# Altium PCB frm-voltrod.PcbDoc (part 2 of 2)
Units mm, origin at the board's own origin, x right, y up, seen from the top; angles counter-clockwise.
Board outline 80 x 200 mm, 2 copper layers (Top Layer, Bottom Layer), stack 1.56 mm thick; 234 components, 176 nets, 667 pads, 121 vias.
Unrouted connection lines stored in the file: 240.
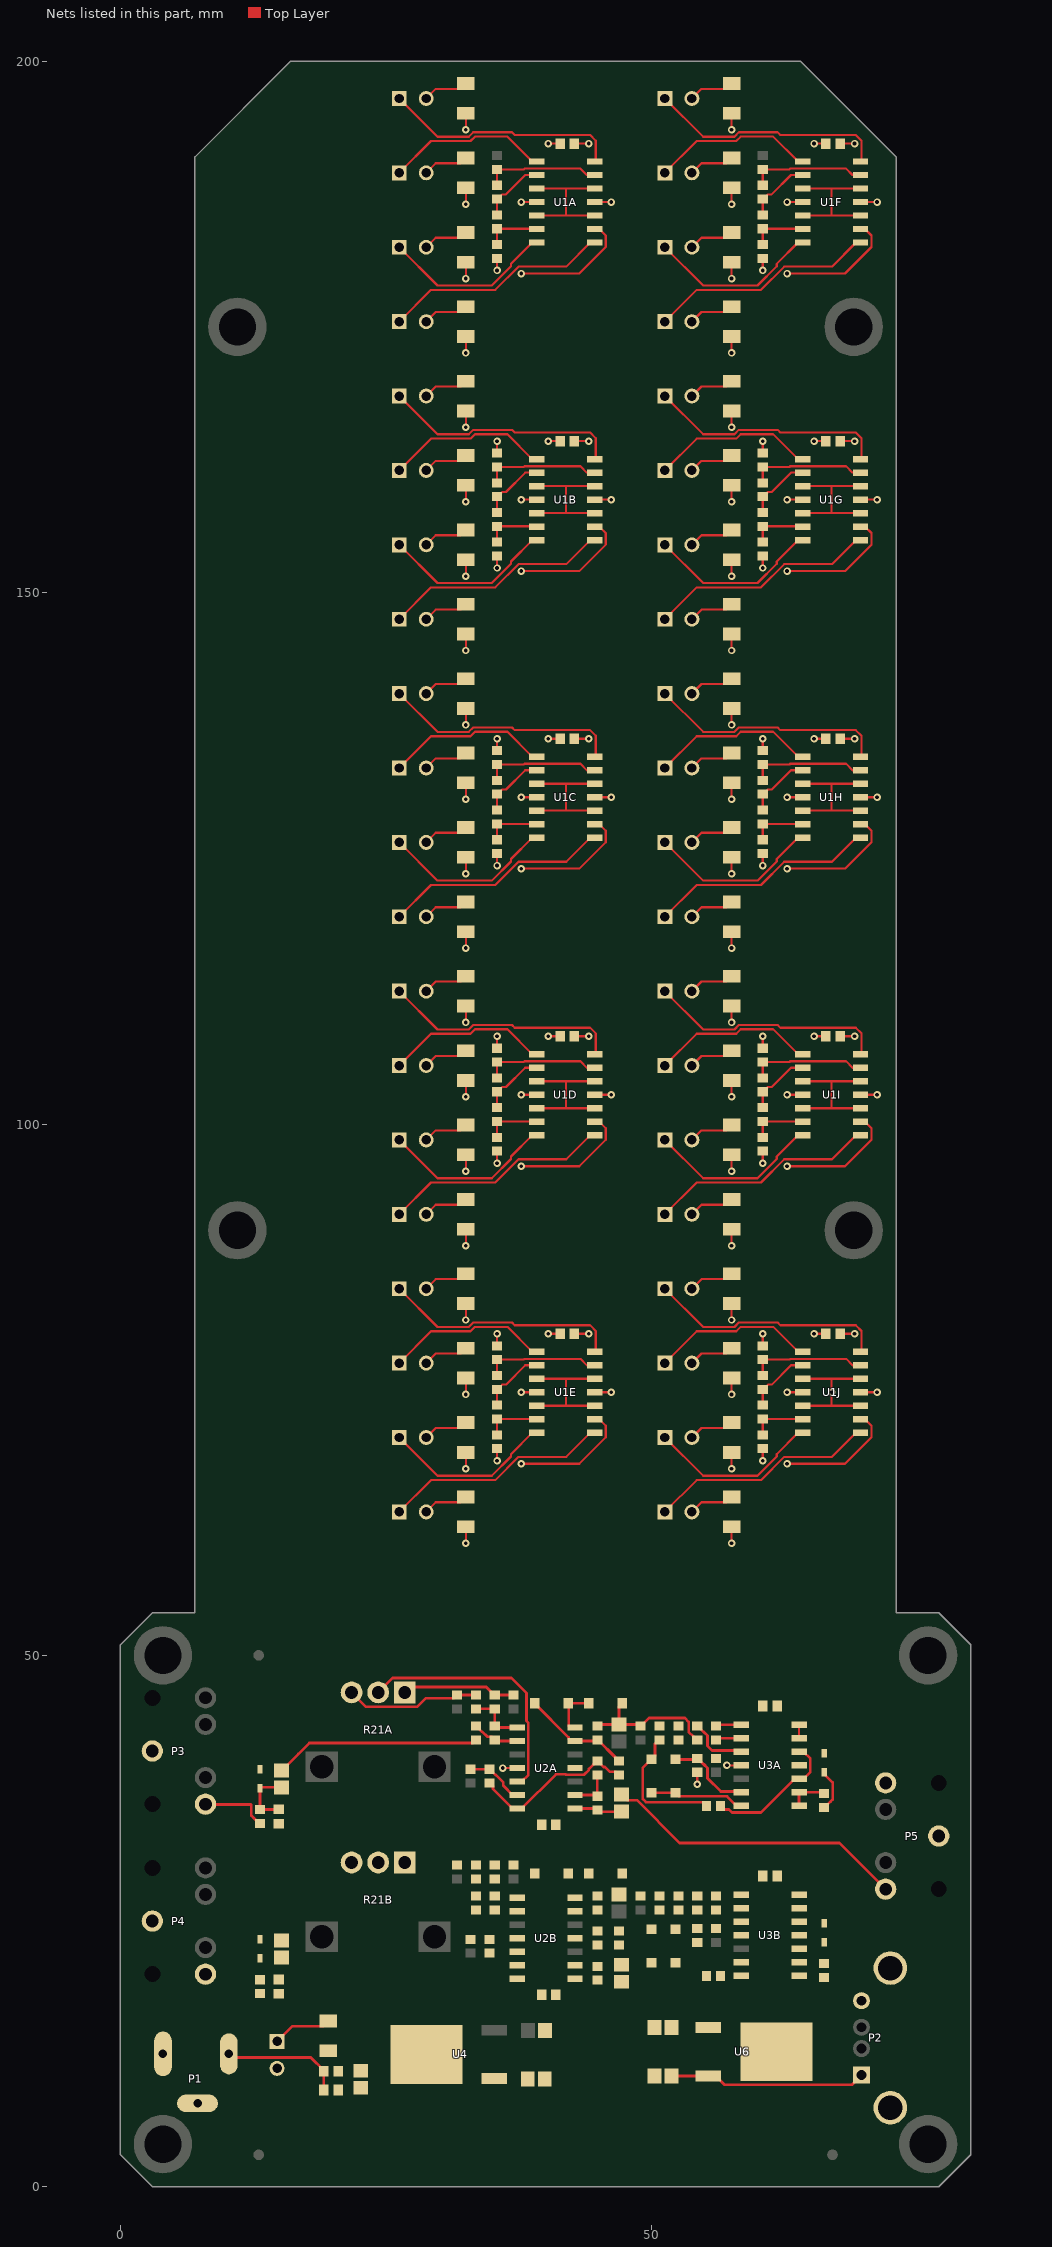
[diagram p2: the nets of this part, all layers, seen from the top]

## Via types
v1: diameter 0.7, hole 0.35, Top Layer to Bottom Layer, tented both sides, 121 vias

## Nets (pads, with @x,y where several pads share a name; then routed paths per layer and width w, separated by ;. In a path a pad name is that pad's centre, name@x,y a point inside that pad or via, vN(x,y) a via of type N, cw(c..) or ccw(c..) an arc to the next point about the centre after c; other vN are vias at no path point) (continued)
+12V: C1A.1 C1B.1 C1C.1 C1D.1 C1E.1 C1F.1 C1G.1 C1H.1 C1I.1 C1J.1 C2A.1 C2B.1 C3A.1 C3B.1 C8.1 C9.1 C12.1 L1.2 L2.2 R29A.2 R29B.2 R32.2 U1A.4 U1B.4 U1C.4 U1D.4 U1E.4 U1F.4 U1G.4 U1H.4 U1I.4 U1J.4 U2A.4 U2B.4 U3A.4 U3B.4 U4.1 U6.1 | length 29.5
  Top Layer w0.203: v1(35.984,39.396) U2A.4@37.323,39.396 ; v1(37.724,74.754) U1E.4@39.187,74.754 ; v1(37.724,102.754) U1D.4@39.187,102.754 ; v1(37.724,130.754) U1C.4@39.187,130.754 ; v1(37.724,158.754) U1B.4@39.187,158.754 ; v1(37.724,186.754) U1A.4@39.187,186.754 ; v1(40.264,80.256) C1E.1@41.367,80.256 ; v1(40.264,108.256) C1D.1@41.367,108.256 ; v1(40.264,136.256) C1C.1@41.367,136.256 ; v1(40.264,164.256) C1B.1@41.367,164.256 ; v1(40.264,192.256) C1A.1@41.367,192.256 ; v1(54.272,37.872) R29A.2@54.272,39 ; v1(57.066,39.65) U3A.4@58.405,39.65 ; v1(62.724,74.754) U1J.4@64.187,74.754 ; v1(62.724,102.754) U1I.4@64.187,102.754 ; v1(62.724,130.754) U1H.4@64.187,130.754 ; v1(62.724,158.754) U1G.4@64.187,158.754 ; v1(62.724,186.754) U1F.4@64.187,186.754 ; v1(65.264,80.256) C1J.1@66.367,80.256 ; v1(65.264,108.256) C1I.1@66.367,108.256 ; v1(65.264,136.256) C1H.1@66.367,136.256 ; v1(65.264,164.256) C1G.1@66.367,164.256 ; v1(65.264,192.256) C1F.1@66.367,192.256
GND: C1A.2 C1B.2 C1C.2 C1D.2 C1E.2 C1F.2 C1G.2 C1H.2 C1I.2 C1J.2 C2A.2 C2B.2 C3A.2 C3B.2 C6A.2 C6B.2 C8.2 C9.2 C10.2 C12.2 C13.2 D7A.2 D7B.2 D8A.2 D8B.2 D11.1 P1.2 P1.3 P2.4 P2.5 P2.6 P3.1 P4.1 P5.1 R2A.2 R2B.2 R2C.2 R2D.2 R2E.2 R2F.2 R2G.2 R2H.2 R2I.2 R2J.2 R4A.2 R4B.2 R4C.2 R4D.2 R4E.2 R4F.2 R4G.2 R4H.2 R4I.2 R4J.2 R6A.2 R6B.2 R6C.2 R6D.2 R6E.2 R6F.2 R6G.2 R6H.2 R6I.2 R6J.2 R7E.2 R7J.2 R8A.2 R8B.2 R8C.2 R8D.2 R8E.2 R8F.2 R8G.2 R8H.2 R8I.2 R8J.2 R26A.2 R26B.2 U1A.11 U1B.11 U1C.11 U1D.11 U1E.9 U1E.11 U1F.11 U1G.11 U1H.11 U1I.11 U1J.9 U1J.11 U2A.11 U2B.11 U3A.11 U3B.11 U4.4 U6.4 | length 115.9
  Top Layer w0.203: v1(32.5,60.554) R8E.2@32.5,62.1 ; v1(32.5,67.554) R6E.2@32.5,69.1 ; v1(32.5,74.554) R4E.2@32.5,76.1 ; v1(32.5,81.554) R2E.2@32.5,83.1 ; v1(32.5,88.554) R8D.2@32.5,90.1 ; v1(32.5,95.554) R6D.2@32.5,97.1 ; v1(32.5,102.554) R4D.2@32.5,104.1 ; v1(32.5,109.554) R2D.2@32.5,111.1 ; v1(32.5,116.554) R8C.2@32.5,118.1 ; v1(32.5,123.554) R6C.2@32.5,125.1 ; v1(32.5,130.554) R4C.2@32.5,132.1 ; v1(32.5,137.554) R2C.2@32.5,139.1 ; v1(32.5,144.554) R8B.2@32.5,146.1 ; v1(32.5,151.554) R6B.2@32.5,153.1 ; v1(32.5,158.554) R4B.2@32.5,160.1 ; v1(32.5,165.554) R2B.2@32.5,167.1 ; v1(32.5,172.554) R8A.2@32.5,174.1 ; v1(32.5,179.554) R6A.2@32.5,181.1 ; v1(32.5,186.554) R4A.2@32.5,188.1 ; v1(32.5,193.554) R2A.2@32.5,195.1 ; v1(35.438,68.318) R7E.2@35.438,69.446 ; v1(37.724,68.026) 43.175,68.026 45.667,70.518 45.667,71.609 45.062,72.214 U1E.9@44.637,72.214 ; C1E.2@42.717,80.256 v1(44.074,80.256) ; C1D.2@42.717,108.256 v1(44.074,108.256) ; C1C.2@42.717,136.256 v1(44.074,136.256) ; C1B.2@42.717,164.256 v1(44.074,164.256) ; C1A.2@42.717,192.256 v1(44.074,192.256) ; U1E.11@44.637,74.754 v1(46.192,74.754) ; U1D.11@44.637,102.754 v1(46.192,102.754) ; U1C.11@44.637,130.754 v1(46.192,130.754) ; U1B.11@44.637,158.754 v1(46.192,158.754) ; U1A.11@44.637,186.754 v1(46.192,186.754) ; v1(57.5,60.554) R8J.2@57.5,62.1 ; v1(57.5,67.554) R6J.2@57.5,69.1 ; v1(57.5,74.554) R4J.2@57.5,76.1 ; v1(57.5,81.554) R2J.2@57.5,83.1 ; v1(57.5,88.554) R8I.2@57.5,90.1 ; v1(57.5,95.554) R6I.2@57.5,97.1 ; v1(57.5,102.554) R4I.2@57.5,104.1 ; v1(57.5,109.554) R2I.2@57.5,111.1 ; v1(57.5,116.554) R8H.2@57.5,118.1 ; v1(57.5,123.554) R6H.2@57.5,125.1 ; v1(57.5,130.554) R4H.2@57.5,132.1 ; v1(57.5,137.554) R2H.2@57.5,139.1 ; v1(57.5,144.554) R8G.2@57.5,146.1 ; v1(57.5,151.554) R6G.2@57.5,153.1 ; v1(57.5,158.554) R4G.2@57.5,160.1 ; v1(57.5,165.554) R2G.2@57.5,167.1 ; v1(57.5,172.554) R8F.2@57.5,174.1 ; v1(57.5,179.554) R6F.2@57.5,181.1 ; v1(57.5,186.554) R4F.2@57.5,188.1 ; v1(57.5,193.554) R2F.2@57.5,195.1 ; v1(60.438,68.318) R7J.2@60.438,69.446 ; v1(62.724,68.026) 68.175,68.026 70.667,70.518 70.667,71.609 70.062,72.214 U1J.9@69.637,72.214 ; C1J.2@67.717,80.256 v1(69.074,80.256) ; C1I.2@67.717,108.256 v1(69.074,108.256) ; C1H.2@67.717,136.256 v1(69.074,136.256) ; C1G.2@67.717,164.256 v1(69.074,164.256) ; C1F.2@67.717,192.256 v1(69.074,192.256) ; U1J.11@69.637,74.754 v1(71.192,74.754) ; U1I.11@69.637,102.754 v1(71.192,102.754) ; U1H.11@69.637,130.754 v1(71.192,130.754) ; U1G.11@69.637,158.754 v1(71.192,158.754) ; U1F.11@69.637,186.754 v1(71.192,186.754)
NetC4A_1: C4A.1 C6A.1 D7A.1 R16A.1 | length 5.9
  Top Layer w0.254: C6A.1@14.902,35.499 13.149,35.499 R16A.1@13.124,35.474 D7A.1@13.124,37.48 13.224,37.58 C4A.1@15.156,37.58
NetC4A_2: C4A.2 R19A.1 | length 19.5
  Top Layer w0.254: C4A.2@15.156,39.18 15.206,39.18 16.75,40.724 16.75,40.729 17.771,41.75 33.146,41.75 R19A.1@33.444,42.048
NetC4B_1: C4B.1 C6B.1 D7B.1 R16B.1
NetC4B_2: C4B.2 R19B.1
NetC5A_1: C5A.1 D6A.1 R9A.2 R18A.2 R24A.1 | length 13.4
  Top Layer w0.254: R9A.2@44.874,43.348 45.024,43.498 C5A.1@46.906,43.498 ; D6A.1@47.211,45.492 46.906,45.187 C5A.1@46.906,43.498 ; R24A.1@54.272,42.048 53.974,42.346 53.907,42.346 53.467,42.786 53.467,43.742 53.106,44.103 49.743,44.103 48.988,43.348 R18A.2@48.938,43.348 48.788,43.498 C5A.1@46.906,43.498
NetC5B_1: C5B.1 D6B.1 R9B.2 R18B.2 R24B.1
NetC7A_1: C7A.1 R27A.2 U2A.8 | length 4.5
  Top Layer w0.254: U2A.8@42.773,35.586 44.732,35.586 R27A.2@44.874,35.444 45.024,35.294 C7A.1@47.16,35.294
NetC7A_2: C7A.2 P5.2 | length 28.5
  Top Layer w0.254: C7A.2@47.16,36.894 47.683,36.371 48.603,36.371 52.622,32.353 67.647,32.353 P5.2@72,28
NetC7B_1: C7B.1 R27B.2 U2B.8
NetC7B_2: C7B.2 P5.3
NetC13_1: C13.1 P2.1 U6.3 | length 18.6
  Top Layer w0.254: C13.1@51.854,10.414 55.316,10.414 U6.3@55.322,10.42 56.022,10.42 56.847,9.595 68.824,9.595 P2.1@69.729,10.5
NetD1A_1: D1A.1 R2A.1 | length 4.3
  Top Layer w0.203: D1A.1@28.77,196.5 29.672,197.402 32.002,197.402 R2A.1@32.5,197.9
NetD1A_2: D1A.2 U1A.14 | length 22.5
  Top Layer w0.203: D1A.2@26.23,196.5 29.831,192.899 32.771,192.899 33.189,193.317 36.837,193.317 37.094,193.061 44.195,193.061 44.729,192.527 44.729,190.656 U1A.14@44.637,190.564
NetD1B_1: D1B.1 R2B.1 | length 4.3
  Top Layer w0.203: D1B.1@28.77,168.5 29.672,169.402 32.002,169.402 R2B.1@32.5,169.9
NetD1B_2: D1B.2 U1B.14 | length 22.5
  Top Layer w0.203: D1B.2@26.23,168.5 29.831,164.899 32.771,164.899 33.189,165.317 36.837,165.317 37.094,165.061 44.195,165.061 44.729,164.527 44.729,162.656 U1B.14@44.637,162.564
NetD1C_1: D1C.1 R2C.1 | length 4.3
  Top Layer w0.203: D1C.1@28.77,140.5 29.672,141.402 32.002,141.402 R2C.1@32.5,141.9
NetD1C_2: D1C.2 U1C.14 | length 22.5
  Top Layer w0.203: D1C.2@26.23,140.5 29.831,136.899 32.771,136.899 33.189,137.317 36.837,137.317 37.094,137.061 44.195,137.061 44.729,136.527 44.729,134.656 U1C.14@44.637,134.564
NetD1D_1: D1D.1 R2D.1 | length 4.3
  Top Layer w0.203: D1D.1@28.77,112.5 29.672,113.402 32.002,113.402 R2D.1@32.5,113.9
NetD1D_2: D1D.2 U1D.14 | length 22.5
  Top Layer w0.203: D1D.2@26.23,112.5 29.831,108.899 32.771,108.899 33.189,109.317 36.837,109.317 37.094,109.061 44.195,109.061 44.729,108.527 44.729,106.656 U1D.14@44.637,106.564
NetD1E_1: D1E.1 R2E.1 | length 4.3
  Top Layer w0.203: D1E.1@28.77,84.5 29.672,85.402 32.002,85.402 R2E.1@32.5,85.9
NetD1E_2: D1E.2 U1E.14 | length 22.5
  Top Layer w0.203: D1E.2@26.23,84.5 29.831,80.899 32.771,80.899 33.189,81.317 36.837,81.317 37.094,81.061 44.195,81.061 44.729,80.527 44.729,78.656 U1E.14@44.637,78.564
NetD1F_1: D1F.1 R2F.1 | length 4.3
  Top Layer w0.203: D1F.1@53.77,196.5 54.672,197.402 57.002,197.402 R2F.1@57.5,197.9
NetD1F_2: D1F.2 U1F.14 | length 22.5
  Top Layer w0.203: D1F.2@51.23,196.5 54.831,192.899 57.771,192.899 58.189,193.317 61.837,193.317 62.094,193.061 69.195,193.061 69.729,192.527 69.729,190.656 U1F.14@69.637,190.564
NetD1G_1: D1G.1 R2G.1 | length 4.3
  Top Layer w0.203: D1G.1@53.77,168.5 54.672,169.402 57.002,169.402 R2G.1@57.5,169.9
NetD1G_2: D1G.2 U1G.14 | length 22.5
  Top Layer w0.203: D1G.2@51.23,168.5 54.831,164.899 57.771,164.899 58.189,165.317 61.837,165.317 62.094,165.061 69.195,165.061 69.729,164.527 69.729,162.656 U1G.14@69.637,162.564
NetD1H_1: D1H.1 R2H.1 | length 4.3
  Top Layer w0.203: D1H.1@53.77,140.5 54.672,141.402 57.002,141.402 R2H.1@57.5,141.9
NetD1H_2: D1H.2 U1H.14 | length 22.5
  Top Layer w0.203: D1H.2@51.23,140.5 54.831,136.899 57.771,136.899 58.189,137.317 61.837,137.317 62.094,137.061 69.195,137.061 69.729,136.527 69.729,134.656 U1H.14@69.637,134.564
NetD1I_1: D1I.1 R2I.1 | length 4.3
  Top Layer w0.203: D1I.1@53.77,112.5 54.672,113.402 57.002,113.402 R2I.1@57.5,113.9
NetD1I_2: D1I.2 U1I.14 | length 22.5
  Top Layer w0.203: D1I.2@51.23,112.5 54.831,108.899 57.771,108.899 58.189,109.317 61.837,109.317 62.094,109.061 69.195,109.061 69.729,108.527 69.729,106.656 U1I.14@69.637,106.564
NetD1J_1: D1J.1 R2J.1 | length 4.3
  Top Layer w0.203: D1J.1@53.77,84.5 54.672,85.402 57.002,85.402 R2J.1@57.5,85.9
NetD1J_2: D1J.2 U1J.14 | length 22.5
  Top Layer w0.203: D1J.2@51.23,84.5 54.831,80.899 57.771,80.899 58.189,81.317 61.837,81.317 62.094,81.061 69.195,81.061 69.729,80.527 69.729,78.656 U1J.14@69.637,78.564
NetD2A_1: D2A.1 R4A.1 | length 4.3
  Top Layer w0.203: D2A.1@28.77,189.5 29.672,190.402 32.002,190.402 R4A.1@32.5,190.9
NetD2A_2: D2A.2 U1A.1 | length 15.3
  Top Layer w0.203: D2A.2@26.23,189.5 29.223,192.493 32.94,192.493 33.358,192.911 36.415,192.911 38.762,190.564 U1A.1@39.187,190.564
NetD2B_1: D2B.1 R4B.1 | length 4.3
  Top Layer w0.203: D2B.1@28.77,161.5 29.672,162.402 32.002,162.402 R4B.1@32.5,162.9
NetD2B_2: D2B.2 U1B.1 | length 15.3
  Top Layer w0.203: D2B.2@26.23,161.5 29.223,164.493 32.94,164.493 33.358,164.911 36.415,164.911 38.762,162.564 U1B.1@39.187,162.564
NetD2C_1: D2C.1 R4C.1 | length 4.3
  Top Layer w0.203: D2C.1@28.77,133.5 29.672,134.402 32.002,134.402 R4C.1@32.5,134.9
NetD2C_2: D2C.2 U1C.1 | length 15.3
  Top Layer w0.203: D2C.2@26.23,133.5 29.223,136.493 32.94,136.493 33.358,136.911 36.415,136.911 38.762,134.564 U1C.1@39.187,134.564
NetD2D_1: D2D.1 R4D.1 | length 4.3
  Top Layer w0.203: D2D.1@28.77,105.5 29.672,106.402 32.002,106.402 R4D.1@32.5,106.9
NetD2D_2: D2D.2 U1D.1 | length 15.3
  Top Layer w0.203: D2D.2@26.23,105.5 29.223,108.493 32.94,108.493 33.358,108.911 36.415,108.911 38.762,106.564 U1D.1@39.187,106.564
NetD2E_1: D2E.1 R4E.1 | length 4.3
  Top Layer w0.203: D2E.1@28.77,77.5 29.672,78.402 32.002,78.402 R4E.1@32.5,78.9
NetD2E_2: D2E.2 U1E.1 | length 15.3
  Top Layer w0.203: D2E.2@26.23,77.5 29.223,80.493 32.94,80.493 33.358,80.911 36.415,80.911 38.762,78.564 U1E.1@39.187,78.564
NetD2F_1: D2F.1 R4F.1 | length 4.3
  Top Layer w0.203: D2F.1@53.77,189.5 54.672,190.402 57.002,190.402 R4F.1@57.5,190.9
NetD2F_2: D2F.2 U1F.1 | length 15.3
  Top Layer w0.203: D2F.2@51.23,189.5 54.223,192.493 57.94,192.493 58.358,192.911 61.415,192.911 63.762,190.564 U1F.1@64.187,190.564
NetD2G_1: D2G.1 R4G.1 | length 4.3
  Top Layer w0.203: D2G.1@53.77,161.5 54.672,162.402 57.002,162.402 R4G.1@57.5,162.9
NetD2G_2: D2G.2 U1G.1 | length 15.3
  Top Layer w0.203: D2G.2@51.23,161.5 54.223,164.493 57.94,164.493 58.358,164.911 61.415,164.911 63.762,162.564 U1G.1@64.187,162.564
NetD2H_1: D2H.1 R4H.1 | length 4.3
  Top Layer w0.203: D2H.1@53.77,133.5 54.672,134.402 57.002,134.402 R4H.1@57.5,134.9
NetD2H_2: D2H.2 U1H.1 | length 15.3
  Top Layer w0.203: D2H.2@51.23,133.5 54.223,136.493 57.94,136.493 58.358,136.911 61.415,136.911 63.762,134.564 U1H.1@64.187,134.564
NetD2I_1: D2I.1 R4I.1 | length 4.3
  Top Layer w0.203: D2I.1@53.77,105.5 54.672,106.402 57.002,106.402 R4I.1@57.5,106.9
NetD2I_2: D2I.2 U1I.1 | length 15.3
  Top Layer w0.203: D2I.2@51.23,105.5 54.223,108.493 57.94,108.493 58.358,108.911 61.415,108.911 63.762,106.564 U1I.1@64.187,106.564
NetD2J_1: D2J.1 R4J.1 | length 4.3
  Top Layer w0.203: D2J.1@53.77,77.5 54.672,78.402 57.002,78.402 R4J.1@57.5,78.9
NetD2J_2: D2J.2 U1J.1 | length 15.3
  Top Layer w0.203: D2J.2@51.23,77.5 54.223,80.493 57.94,80.493 58.358,80.911 61.415,80.911 63.762,78.564 U1J.1@64.187,78.564
NetD3A_1: D3A.1 R6A.1 | length 4.3
  Top Layer w0.203: D3A.1@28.77,182.5 29.672,183.402 32.002,183.402 R6A.1@32.5,183.9
NetD3A_2: D3A.2 U1A.7 | length 16.3
  Top Layer w0.203: D3A.2@26.23,182.5 29.831,178.899 34.945,178.899 36.754,180.708 36.754,180.936 38.762,182.944 U1A.7@39.187,182.944
NetD3B_1: D3B.1 R6B.1 | length 4.3
  Top Layer w0.203: D3B.1@28.77,154.5 29.672,155.402 32.002,155.402 R6B.1@32.5,155.9
NetD3B_2: D3B.2 U1B.7 | length 16.3
  Top Layer w0.203: D3B.2@26.23,154.5 29.831,150.899 34.945,150.899 36.754,152.708 36.754,152.936 38.762,154.944 U1B.7@39.187,154.944
NetD3C_1: D3C.1 R6C.1 | length 4.3
  Top Layer w0.203: D3C.1@28.77,126.5 29.672,127.402 32.002,127.402 R6C.1@32.5,127.9
NetD3C_2: D3C.2 U1C.7 | length 16.3
  Top Layer w0.203: D3C.2@26.23,126.5 29.831,122.899 34.945,122.899 36.754,124.708 36.754,124.936 38.762,126.944 U1C.7@39.187,126.944
NetD3D_1: D3D.1 R6D.1 | length 4.3
  Top Layer w0.203: D3D.1@28.77,98.5 29.672,99.402 32.002,99.402 R6D.1@32.5,99.9
NetD3D_2: D3D.2 U1D.7 | length 16.3
  Top Layer w0.203: D3D.2@26.23,98.5 29.831,94.899 34.945,94.899 36.754,96.708 36.754,96.936 38.762,98.944 U1D.7@39.187,98.944
NetD3E_1: D3E.1 R6E.1 | length 4.3
  Top Layer w0.203: D3E.1@28.77,70.5 29.672,71.402 32.002,71.402 R6E.1@32.5,71.9
NetD3E_2: D3E.2 U1E.7 | length 16.3
  Top Layer w0.203: D3E.2@26.23,70.5 29.831,66.899 34.945,66.899 36.754,68.708 36.754,68.936 38.762,70.944 U1E.7@39.187,70.944
NetD3F_1: D3F.1 R6F.1 | length 4.3
  Top Layer w0.203: D3F.1@53.77,182.5 54.672,183.402 57.002,183.402 R6F.1@57.5,183.9
NetD3F_2: D3F.2 U1F.7 | length 16.3
  Top Layer w0.203: D3F.2@51.23,182.5 54.831,178.899 59.945,178.899 61.754,180.708 61.754,180.936 63.762,182.944 U1F.7@64.187,182.944
NetD3G_1: D3G.1 R6G.1 | length 4.3
  Top Layer w0.203: D3G.1@53.77,154.5 54.672,155.402 57.002,155.402 R6G.1@57.5,155.9
NetD3G_2: D3G.2 U1G.7 | length 16.3
  Top Layer w0.203: D3G.2@51.23,154.5 54.831,150.899 59.945,150.899 61.754,152.708 61.754,152.936 63.762,154.944 U1G.7@64.187,154.944
NetD3H_1: D3H.1 R6H.1 | length 4.3
  Top Layer w0.203: D3H.1@53.77,126.5 54.672,127.402 57.002,127.402 R6H.1@57.5,127.9
NetD3H_2: D3H.2 U1H.7 | length 16.3
  Top Layer w0.203: D3H.2@51.23,126.5 54.831,122.899 59.945,122.899 61.754,124.708 61.754,124.936 63.762,126.944 U1H.7@64.187,126.944
NetD3I_1: D3I.1 R6I.1 | length 4.3
  Top Layer w0.203: D3I.1@53.77,98.5 54.672,99.402 57.002,99.402 R6I.1@57.5,99.9
NetD3I_2: D3I.2 U1I.7 | length 16.3
  Top Layer w0.203: D3I.2@51.23,98.5 54.831,94.899 59.945,94.899 61.754,96.708 61.754,96.936 63.762,98.944 U1I.7@64.187,98.944
NetD3J_1: D3J.1 R6J.1 | length 4.3
  Top Layer w0.203: D3J.1@53.77,70.5 54.672,71.402 57.002,71.402 R6J.1@57.5,71.9
NetD3J_2: D3J.2 U1J.7 | length 16.3
  Top Layer w0.203: D3J.2@51.23,70.5 54.831,66.899 59.945,66.899 61.754,68.708 61.754,68.936 63.762,70.944 U1J.7@64.187,70.944
NetD4A_1: D4A.1 R8A.1 | length 4.3
  Top Layer w0.203: D4A.1@28.77,175.5 29.672,176.402 32.002,176.402 R8A.1@32.5,176.9
NetD4A_2: D4A.2 U1A.8 | length 21.5
  Top Layer w0.203: D4A.2@26.23,175.5 29.223,178.493 35.265,178.493 37.453,180.681 41.949,180.681 44.212,182.944 U1A.8@44.637,182.944
NetD4B_1: D4B.1 R8B.1 | length 4.3
  Top Layer w0.203: D4B.1@28.77,147.5 29.672,148.402 32.002,148.402 R8B.1@32.5,148.9
NetD4B_2: D4B.2 U1B.8 | length 21.5
  Top Layer w0.203: D4B.2@26.23,147.5 29.223,150.493 35.265,150.493 37.453,152.681 41.949,152.681 44.212,154.944 U1B.8@44.637,154.944
NetD4C_1: D4C.1 R8C.1 | length 4.3
  Top Layer w0.203: D4C.1@28.77,119.5 29.672,120.402 32.002,120.402 R8C.1@32.5,120.9
NetD4C_2: D4C.2 U1C.8 | length 21.5
  Top Layer w0.203: D4C.2@26.23,119.5 29.223,122.493 35.265,122.493 37.453,124.681 41.949,124.681 44.212,126.944 U1C.8@44.637,126.944
NetD4D_1: D4D.1 R8D.1 | length 4.3
  Top Layer w0.203: D4D.1@28.77,91.5 29.672,92.402 32.002,92.402 R8D.1@32.5,92.9
NetD4D_2: D4D.2 U1D.8 | length 21.5
  Top Layer w0.203: D4D.2@26.23,91.5 29.223,94.493 35.265,94.493 37.453,96.681 41.949,96.681 44.212,98.944 U1D.8@44.637,98.944
NetD4E_1: D4E.1 R8E.1 | length 4.3
  Top Layer w0.203: D4E.1@28.77,63.5 29.672,64.402 32.002,64.402 R8E.1@32.5,64.9
NetD4E_2: D4E.2 U1E.8 | length 21.5
  Top Layer w0.203: D4E.2@26.23,63.5 29.223,66.493 35.265,66.493 37.453,68.681 41.949,68.681 44.212,70.944 U1E.8@44.637,70.944
NetD4F_1: D4F.1 R8F.1 | length 4.3
  Top Layer w0.203: D4F.1@53.77,175.5 54.672,176.402 57.002,176.402 R8F.1@57.5,176.9
NetD4F_2: D4F.2 U1F.8 | length 21.5
  Top Layer w0.203: D4F.2@51.23,175.5 54.223,178.493 60.265,178.493 62.453,180.681 66.949,180.681 69.212,182.944 U1F.8@69.637,182.944
NetD4G_1: D4G.1 R8G.1 | length 4.3
  Top Layer w0.203: D4G.1@53.77,147.5 54.672,148.402 57.002,148.402 R8G.1@57.5,148.9
NetD4G_2: D4G.2 U1G.8 | length 21.5
  Top Layer w0.203: D4G.2@51.23,147.5 54.223,150.493 60.265,150.493 62.453,152.681 66.949,152.681 69.212,154.944 U1G.8@69.637,154.944
NetD4H_1: D4H.1 R8H.1 | length 4.3
  Top Layer w0.203: D4H.1@53.77,119.5 54.672,120.402 57.002,120.402 R8H.1@57.5,120.9
NetD4H_2: D4H.2 U1H.8 | length 21.5
  Top Layer w0.203: D4H.2@51.23,119.5 54.223,122.493 60.265,122.493 62.453,124.681 66.949,124.681 69.212,126.944 U1H.8@69.637,126.944
NetD4I_1: D4I.1 R8I.1 | length 4.3
  Top Layer w0.203: D4I.1@53.77,91.5 54.672,92.402 57.002,92.402 R8I.1@57.5,92.9
NetD4I_2: D4I.2 U1I.8 | length 21.5
  Top Layer w0.203: D4I.2@51.23,91.5 54.223,94.493 60.265,94.493 62.453,96.681 66.949,96.681 69.212,98.944 U1I.8@69.637,98.944
NetD4J_1: D4J.1 R8J.1 | length 4.3
  Top Layer w0.203: D4J.1@53.77,63.5 54.672,64.402 57.002,64.402 R8J.1@57.5,64.9
NetD4J_2: D4J.2 U1J.8 | length 21.5
  Top Layer w0.203: D4J.2@51.23,63.5 54.223,66.493 60.265,66.493 62.453,68.681 66.949,68.681 69.212,70.944 U1J.8@69.637,70.944
NetD5A_1: D5A.1 D6A.2 U2A.14 | length 4.7
  Top Layer w0.254: U2A.14@42.773,43.206 42.348,43.206 42.175,43.379 42.175,45.448 D5A.1@42.131,45.492 D6A.2@44.061,45.492
NetD5A_2: D5A.2 R9A.1 R20A.2 U2A.13 | length 10.4
  Top Layer w0.254: D5A.2@38.981,45.492 38.981,45.467 42.175,42.273 42.175,42.109 42.348,41.936 U2A.13@42.773,41.936 44.762,41.936 R9A.1@44.874,42.048 44.924,42.048 46.558,40.414 46.558,40.344 46.856,40.046 R20A.2@46.906,40.046
NetD5B_1: D5B.1 D6B.2 U2B.14
NetD5B_2: D5B.2 R9B.1 R20B.2 U2B.13
NetD8A_1: D8A.1 R31A.1 | length 4
  Top Layer w0.254: R31A.1@66.21,35.698 66.26,35.698 66.805,36.243 66.822,36.243 67.015,36.436 67.015,38.049 66.21,38.854 D8A.1@66.21,39.004
NetD8B_1: D8B.1 R31B.1
NetD9A_1: D9A.1 D10A.1 U3A.7 | length 9
  Top Layer w0.254: D10A.1@49.954,37.059 D9A.1@52.24,37.059 52.563,36.736 57.084,36.736 57.98,35.84 U3A.7@58.405,35.84
NetD9A_2: D9A.2 R29A.1 U3A.6 | length 8.1
  Top Layer w0.254: D9A.2@52.24,40.209 54.181,40.209 R29A.1@54.272,40.3 54.322,40.3 54.867,39.755 54.884,39.755 55.245,39.394 55.245,38.438 56.49,37.193 58.322,37.193 U3A.6@58.405,37.11
NetD9B_1: D9B.1 D10B.1 U3B.7
NetD9B_2: D9B.2 R29B.1 U3B.6
NetD10A_2: D10A.2 R22A.1 R23A.2 | length 12.6
  Top Layer w0.254: R22A.1@50.716,42.048 50.666,42.048 50.302,41.684 50.302,40.532 49.979,40.209 D10A.2@49.954,40.209 49.929,40.209 49.149,39.429 49.149,36.472 49.433,36.188 54.848,36.188 55.146,35.89 R23A.2@55.146,35.84
NetD10B_2: D10B.2 R22B.1 R23B.2
NetD11_2: D11.2 R32.1 | length 5.6
  Top Layer w0.254: D11.2@14.732,13.676 16.167,15.111 19.085,15.111 R32.1@19.558,15.584
NetL1_1: L1.1 L2.1 P1.1 | length 11.4
  Top Layer w0.254: P1.1@10.2,12.5 10.534,12.166 17.903,12.166 19.137,10.932 L1.1@19.137,10.882 L2.1@19.137,9.104
NetP3_3: P3.3 R16A.2 | length 6.9
  Top Layer w0.254: P3.3@8,36 8.04,35.96 12.276,35.96 12.319,35.917 12.319,34.912 12.512,34.719 12.529,34.719 13.074,34.174 R16A.2@13.124,34.174 R16A.2@12.826,34.472
NetP4_3: P4.3 R16B.2
NetR1A_2: R1A.2 R3A.1 U1A.13 | length 11
  Top Layer w0.203: R3A.1@35.438,188.334 R1A.2@35.438,189.828 37.953,189.828 38.024,189.899 43.282,189.899 43.887,189.294 U1A.13@44.637,189.294
NetR1B_1: R1B.1 R7A.2 U1A.9 | length 13.6
  Top Layer w0.203: R1B.1@35.438,163.128 v1(35.438,164.256) ; v1(35.438,180.318) R7A.2@35.438,181.446 ; v1(37.724,180.026) 43.175,180.026 45.667,182.518 45.667,183.609 45.062,184.214 U1A.9@44.637,184.214
NetR1B_2: R1B.2 R3B.1 U1B.13 | length 11
  Top Layer w0.203: R3B.1@35.438,160.334 R1B.2@35.438,161.828 37.953,161.828 38.024,161.899 43.282,161.899 43.887,161.294 U1B.13@44.637,161.294
NetR1C_1: R1C.1 R7B.2 U1B.9 | length 13.6
  Top Layer w0.203: R1C.1@35.438,135.128 v1(35.438,136.256) ; v1(35.438,152.318) R7B.2@35.438,153.446 ; v1(37.724,152.026) 43.175,152.026 45.667,154.518 45.667,155.609 45.062,156.214 U1B.9@44.637,156.214
NetR1C_2: R1C.2 R3C.1 U1C.13 | length 11
  Top Layer w0.203: R3C.1@35.438,132.334 R1C.2@35.438,133.828 37.953,133.828 38.024,133.899 43.282,133.899 43.887,133.294 U1C.13@44.637,133.294
NetR1D_1: R1D.1 R7C.2 U1C.9 | length 13.6
  Top Layer w0.203: R1D.1@35.438,107.128 v1(35.438,108.256) ; v1(35.438,124.318) R7C.2@35.438,125.446 ; v1(37.724,124.026) 43.175,124.026 45.667,126.518 45.667,127.609 45.062,128.214 U1C.9@44.637,128.214
NetR1D_2: R1D.2 R3D.1 U1D.13 | length 11
  Top Layer w0.203: R3D.1@35.438,104.334 R1D.2@35.438,105.828 37.953,105.828 38.024,105.899 43.282,105.899 43.887,105.294 U1D.13@44.637,105.294
NetR1E_1: R1E.1 R7D.2 U1D.9 | length 13.6
  Top Layer w0.203: R1E.1@35.438,79.128 v1(35.438,80.256) ; v1(35.438,96.318) R7D.2@35.438,97.446 ; v1(37.724,96.026) 43.175,96.026 45.667,98.518 45.667,99.609 45.062,100.214 U1D.9@44.637,100.214
NetR1E_2: R1E.2 R3E.1 U1E.13 | length 11
  Top Layer w0.203: R3E.1@35.438,76.334 R1E.2@35.438,77.828 37.953,77.828 38.024,77.899 43.282,77.899 43.887,77.294 U1E.13@44.637,77.294
NetR1F_2: R1F.2 R3F.1 U1F.13 | length 11
  Top Layer w0.203: R3F.1@60.438,188.334 R1F.2@60.438,189.828 62.953,189.828 63.024,189.899 68.282,189.899 68.887,189.294 U1F.13@69.637,189.294
NetR1G_1: R1G.1 R7F.2 U1F.9 | length 13.6
  Top Layer w0.203: R1G.1@60.438,163.128 v1(60.438,164.256) ; v1(60.438,180.318) R7F.2@60.438,181.446 ; v1(62.724,180.026) 68.175,180.026 70.667,182.518 70.667,183.609 70.062,184.214 U1F.9@69.637,184.214
NetR1G_2: R1G.2 R3G.1 U1G.13 | length 11
  Top Layer w0.203: R3G.1@60.438,160.334 R1G.2@60.438,161.828 62.953,161.828 63.024,161.899 68.282,161.899 68.887,161.294 U1G.13@69.637,161.294
NetR1H_1: R1H.1 R7G.2 U1G.9 | length 13.6
  Top Layer w0.203: R1H.1@60.438,135.128 v1(60.438,136.256) ; v1(60.438,152.318) R7G.2@60.438,153.446 ; v1(62.724,152.026) 68.175,152.026 70.667,154.518 70.667,155.609 70.062,156.214 U1G.9@69.637,156.214
NetR1H_2: R1H.2 R3H.1 U1H.13 | length 11
  Top Layer w0.203: R3H.1@60.438,132.334 R1H.2@60.438,133.828 62.953,133.828 63.024,133.899 68.282,133.899 68.887,133.294 U1H.13@69.637,133.294
NetR1I_1: R1I.1 R7H.2 U1H.9 | length 13.6
  Top Layer w0.203: R1I.1@60.438,107.128 v1(60.438,108.256) ; v1(60.438,124.318) R7H.2@60.438,125.446 ; v1(62.724,124.026) 68.175,124.026 70.667,126.518 70.667,127.609 70.062,128.214 U1H.9@69.637,128.214
NetR1I_2: R1I.2 R3I.1 U1I.13 | length 11
  Top Layer w0.203: R3I.1@60.438,104.334 R1I.2@60.438,105.828 62.953,105.828 63.024,105.899 68.282,105.899 68.887,105.294 U1I.13@69.637,105.294
NetR1J_1: R1J.1 R7I.2 U1I.9 | length 13.6
  Top Layer w0.203: R1J.1@60.438,79.128 v1(60.438,80.256) ; v1(60.438,96.318) R7I.2@60.438,97.446 ; v1(62.724,96.026) 68.175,96.026 70.667,98.518 70.667,99.609 70.062,100.214 U1I.9@69.637,100.214
NetR1J_2: R1J.2 R3J.1 U1J.13 | length 11
  Top Layer w0.203: R3J.1@60.438,76.334 R1J.2@60.438,77.828 62.953,77.828 63.024,77.899 68.282,77.899 68.887,77.294 U1J.13@69.637,77.294
NetR3A_2: R3A.2 R5A.1 U1A.2 | length 6.2
  Top Layer w0.203: R5A.1@35.438,185.54 R3A.2@35.438,187.034 35.488,187.034 35.931,187.477 36.275,187.477 38.092,189.294 U1A.2@39.187,189.294
NetR3B_2: R3B.2 R5B.1 U1B.2 | length 6.2
  Top Layer w0.203: R5B.1@35.438,157.54 R3B.2@35.438,159.034 35.488,159.034 35.931,159.477 36.275,159.477 38.092,161.294 U1B.2@39.187,161.294
NetR3C_2: R3C.2 R5C.1 U1C.2 | length 6.2
  Top Layer w0.203: R5C.1@35.438,129.54 R3C.2@35.438,131.034 35.488,131.034 35.931,131.477 36.275,131.477 38.092,133.294 U1C.2@39.187,133.294
NetR3D_2: R3D.2 R5D.1 U1D.2 | length 6.2
  Top Layer w0.203: R5D.1@35.438,101.54 R3D.2@35.438,103.034 35.488,103.034 35.931,103.477 36.275,103.477 38.092,105.294 U1D.2@39.187,105.294
NetR3E_2: R3E.2 R5E.1 U1E.2 | length 6.2
  Top Layer w0.203: R5E.1@35.438,73.54 R3E.2@35.438,75.034 35.488,75.034 35.931,75.477 36.275,75.477 38.092,77.294 U1E.2@39.187,77.294
NetR3F_2: R3F.2 R5F.1 U1F.2 | length 6.2
  Top Layer w0.203: R5F.1@60.438,185.54 R3F.2@60.438,187.034 60.488,187.034 60.931,187.477 61.275,187.477 63.092,189.294 U1F.2@64.187,189.294
NetR3G_2: R3G.2 R5G.1 U1G.2 | length 6.2
  Top Layer w0.203: R5G.1@60.438,157.54 R3G.2@60.438,159.034 60.488,159.034 60.931,159.477 61.275,159.477 63.092,161.294 U1G.2@64.187,161.294
NetR3H_2: R3H.2 R5H.1 U1H.2 | length 6.2
  Top Layer w0.203: R5H.1@60.438,129.54 R3H.2@60.438,131.034 60.488,131.034 60.931,131.477 61.275,131.477 63.092,133.294 U1H.2@64.187,133.294
NetR3I_2: R3I.2 R5I.1 U1I.2 | length 6.2
  Top Layer w0.203: R5I.1@60.438,101.54 R3I.2@60.438,103.034 60.488,103.034 60.931,103.477 61.275,103.477 63.092,105.294 U1I.2@64.187,105.294
NetR3J_2: R3J.2 R5J.1 U1J.2 | length 6.2
  Top Layer w0.203: R5J.1@60.438,73.54 R3J.2@60.438,75.034 60.488,75.034 60.931,75.477 61.275,75.477 63.092,77.294 U1J.2@64.187,77.294
NetR5A_2: R5A.2 R7A.1 U1A.6 | length 5.3
  Top Layer w0.203: R7A.1@35.438,182.746 R5A.2@35.438,184.24 39.161,184.24 U1A.6@39.187,184.214
NetR5B_2: R5B.2 R7B.1 U1B.6 | length 5.3
  Top Layer w0.203: R7B.1@35.438,154.746 R5B.2@35.438,156.24 39.161,156.24 U1B.6@39.187,156.214
NetR5C_2: R5C.2 R7C.1 U1C.6 | length 5.3
  Top Layer w0.203: R7C.1@35.438,126.746 R5C.2@35.438,128.24 39.161,128.24 U1C.6@39.187,128.214
NetR5D_2: R5D.2 R7D.1 U1D.6 | length 5.3
  Top Layer w0.203: R7D.1@35.438,98.746 R5D.2@35.438,100.24 39.161,100.24 U1D.6@39.187,100.214
NetR5E_2: R5E.2 R7E.1 U1E.6 | length 5.3
  Top Layer w0.203: R7E.1@35.438,70.746 R5E.2@35.438,72.24 39.161,72.24 U1E.6@39.187,72.214
NetR5F_2: R5F.2 R7F.1 U1F.6 | length 5.3
  Top Layer w0.203: R7F.1@60.438,182.746 R5F.2@60.438,184.24 64.161,184.24 U1F.6@64.187,184.214
NetR5G_2: R5G.2 R7G.1 U1G.6 | length 5.3
  Top Layer w0.203: R7G.1@60.438,154.746 R5G.2@60.438,156.24 64.161,156.24 U1G.6@64.187,156.214
NetR5H_2: R5H.2 R7H.1 U1H.6 | length 5.3
  Top Layer w0.203: R7H.1@60.438,126.746 R5H.2@60.438,128.24 64.161,128.24 U1H.6@64.187,128.214
NetR5I_2: R5I.2 R7I.1 U1I.6 | length 5.3
  Top Layer w0.203: R7I.1@60.438,98.746 R5I.2@60.438,100.24 64.161,100.24 U1I.6@64.187,100.214
NetR5J_2: R5J.2 R7J.1 U1J.6 | length 5.3
  Top Layer w0.203: R7J.1@60.438,70.746 R5J.2@60.438,72.24 64.161,72.24 U1J.6@64.187,72.214
NetR10A_1: R10A.1 R19A.2 U2A.2 | length 4.5
  Top Layer w0.254: R19A.2@33.444,43.348 33.494,43.348 34.039,42.803 34.056,42.803 34.513,42.346 34.924,42.346 R10A.1@35.222,42.048 35.334,41.936 U2A.2@37.323,41.936
NetR10A_2: R10A.2 R17A.1 R25A.1 U2A.1 | length 5.6
  Top Layer w0.254: R25A.1@33.444,44.974 R17A.1@35.222,44.974 R10A.2@35.222,43.348 35.364,43.206 U2A.1@37.323,43.206
NetR10B_1: R10B.1 R19B.2 U2B.2
NetR10B_2: R10B.2 R17B.1 R25B.1 U2B.1
NetR11A_1: R11A.1 R12A.1 U2A.6 | length 5.6
  Top Layer w0.254: R11A.1@32.936,39.284 R12A.1@34.714,39.284 34.764,39.284 35.309,38.739 35.326,38.739 36.025,38.04 36.025,37.729 36.898,36.856 U2A.6@37.323,36.856
NetR11B_1: R11B.1 R12B.1 U2B.6
NetR12A_2: R12A.2 R20A.1 R30A.1 U2A.7 | length 15.8
  Top Layer w0.254: R12A.2@34.714,37.984 34.764,37.984 35.062,37.686 35.062,37.422 36.898,35.586 37.748,35.586 40.968,38.806 41.871,38.806 41.911,38.766 43.635,38.766 44.067,39.198 44.067,39.306 44.509,39.748 44.576,39.748 R30A.1@44.874,40.046 44.924,40.046 45.469,39.501 45.593,39.501 46.05,39.044 46.608,39.044 R20A.1@46.906,38.746
NetR12B_2: R12B.2 R20B.1 R30B.1 U2B.7
NetR13A_2: R13A.2 R17A.2 R21A.1 | length 10.8
  Top Layer w0.254: R21A.1@26.75,46.512 27.267,47.029 34.417,47.029 35.172,46.274 R17A.2@35.222,46.274 R13A.2@37,46.274
NetR13B_2: R13B.2 R17B.2 R21B.1
NetR14A_2: R14A.2 R15A.1 U3A.2 | length 2.4
  Top Layer w0.254: R15A.1@56.05,42.048 56.192,42.19 U3A.2@58.405,42.19
NetR14B_2: R14B.2 R15B.1 U3B.2
NetR15A_2: R15A.2 R22A.2 U3A.1 | length 2.4
  Top Layer w0.254: R15A.2@56.05,43.348 56.162,43.46 U3A.1@58.405,43.46
NetR15B_2: R15B.2 R22B.2 U3B.1
NetR21A_2: R21A.2 U2A.5 | length 24.2
  Top Layer w0.254: R21A.2@24.25,46.512 24.25,46.529 25.588,47.867 36.774,47.867 38.201,46.44 38.201,43.82 38.378,43.643 38.378,38.756 37.748,38.126 U2A.5@37.323,38.126
NetR21A_3: R21A.3 R25A.2 R28A.2 | length 12.7
  Top Layer w0.254: R21A.3@21.75,46.512 23.105,45.157 27.912,45.157 28.731,45.976 31.368,45.976 R28A.2@31.666,46.274 R25A.2@33.444,46.274
NetR21B_2: R21B.2 U2B.5
NetR21B_3: R21B.3 R25B.2 R28B.2
NetR23A_1: R23A.1 U3A.10 U3A.12 | length 12.9
  Top Layer w0.254: R23A.1@56.446,35.84 56.446,35.79 56.744,35.492 57.261,35.492 57.543,35.21 60.26,35.21 63.43,38.38 U3A.10@63.855,38.38 64.28,38.38 64.91,39.01 64.91,40.29 64.28,40.92 U3A.12@63.855,40.92
NetR23B_1: R23B.1 U3B.10 U3B.12
NetR24A_2: R24A.2 R26A.1 U3A.3 | length 5.7
  Top Layer w0.254: R24A.2@54.272,43.348 54.322,43.348 54.867,42.803 54.884,42.803 55.245,42.442 55.245,41.486 55.676,41.055 58.27,41.055 U3A.3@58.405,40.92
NetR24B_2: R24B.2 R26B.1 U3B.3
NetR27A_1: R27A.1 R30A.2 U2A.9 | length 4.1
  Top Layer w0.254: U2A.9@42.773,36.856 44.762,36.856 R27A.1@44.874,36.744 R30A.2@44.874,38.746
NetR27B_1: R27B.1 R30B.2 U2B.9
NetR31A_2: R31A.2 U3A.8 U3A.9 | length 3.7
  Top Layer w0.254: U3A.8@63.855,35.84 U3A.9@63.855,37.11 66.098,37.11 R31A.2@66.21,36.998
NetR31B_2: R31B.2 U3B.8 U3B.9
NetU1A_3: U1A.3 U1A.5 U1A.10 U1A.12 U1B.3 U1B.5 U1B.10 U1B.12 U1C.3 U1C.5 U1C.10 U1C.12 U1D.3 U1D.5 U1D.10 U1D.12 U1E.3 U1E.5 U1E.10 U1E.12 U3A.13 U3A.14 | length 68.5
  Top Layer w0.203: U1E.5@39.187,73.484 41.912,73.484 ; U1E.3@39.187,76.024 41.912,76.024 ; U1D.5@39.187,101.484 41.912,101.484 ; U1D.3@39.187,104.024 41.912,104.024 ; U1C.5@39.187,129.484 41.912,129.484 ; U1C.3@39.187,132.024 41.912,132.024 ; U1B.5@39.187,157.484 41.912,157.484 ; U1B.3@39.187,160.024 41.912,160.024 ; U1A.5@39.187,185.484 41.912,185.484 ; U1A.3@39.187,188.024 41.912,188.024 ; U1E.10@44.637,73.484 41.912,73.484 ; U1E.12@44.637,76.024 41.912,76.024 ; U1D.10@44.637,101.484 41.912,101.484 ; U1D.12@44.637,104.024 41.912,104.024 ; U1C.10@44.637,129.484 41.912,129.484 ; U1C.12@44.637,132.024 41.912,132.024 ; U1B.10@44.637,157.484 41.912,157.484 ; U1B.12@44.637,160.024 41.912,160.024 ; U1A.10@44.637,185.484 41.912,185.484 ; U1A.12@44.637,188.024 41.912,188.024 ; U3A.13@63.855,42.19 U3A.14@63.855,43.46 ; 41.912,73.484 41.912,76.024 ; 41.912,101.484 41.912,104.024 ; 41.912,129.484 41.912,132.024 ; 41.912,157.484 41.912,160.024 ; 41.912,185.484 41.912,188.024
NetU1F_3: U1F.3 U1F.5 U1F.10 U1F.12 U1G.3 U1G.5 U1G.10 U1G.12 U1H.3 U1H.5 U1H.10 U1H.12 U1I.3 U1I.5 U1I.10 U1I.12 U1J.3 U1J.5 U1J.10 U1J.12 U3B.13 U3B.14 | length 67.2
  Top Layer w0.203: U1J.5@64.187,73.484 66.912,73.484 ; U1J.3@64.187,76.024 66.912,76.024 ; U1I.5@64.187,101.484 66.912,101.484 ; U1I.3@64.187,104.024 66.912,104.024 ; U1H.5@64.187,129.484 66.912,129.484 ; U1H.3@64.187,132.024 66.912,132.024 ; U1G.5@64.187,157.484 66.912,157.484 ; U1G.3@64.187,160.024 66.912,160.024 ; U1F.5@64.187,185.484 66.912,185.484 ; U1F.3@64.187,188.024 66.912,188.024 ; U1J.10@69.637,73.484 66.912,73.484 ; U1J.12@69.637,76.024 66.912,76.024 ; U1I.10@69.637,101.484 66.912,101.484 ; U1I.12@69.637,104.024 66.912,104.024 ; U1H.10@69.637,129.484 66.912,129.484 ; U1H.12@69.637,132.024 66.912,132.024 ; U1G.10@69.637,157.484 66.912,157.484 ; U1G.12@69.637,160.024 66.912,160.024 ; U1F.10@69.637,185.484 66.912,185.484 ; U1F.12@69.637,188.024 66.912,188.024 ; 66.912,73.484 66.912,76.024 ; 66.912,101.484 66.912,104.024 ; 66.912,129.484 66.912,132.024 ; 66.912,157.484 66.912,160.024 ; 66.912,185.484 66.912,188.024
  other v1: 66.912,74.754
pads on no net: FD1.5 FD2.5 FD3.5 P2.2 P2.3 P3.2 P3.4 P3.5 P4.2 P4.4 P4.5 P5.4 P5.5 R21A.4 R21B.4

## Silkscreen, mask and mechanical layers (free items; w line width, h text height)
Board outline:
  the board outline again, w0.2
PCBD Notes:
  lines w0.2: 0,0 80,200 ; 0,200 80,0 ; 40,100 40,130 ; 27.5,63.5 52.5,196.5 27.5,196.5 52.5,63.5 27.5,63.5

## Text inside footprints (layer, text, board x,y; h text height)
D1A: Top Overlay "+" at 23.182,195.738 h1.5
D1B: Top Overlay "+" at 23.182,167.738 h1.5
D1C: Top Overlay "+" at 23.182,139.738 h1.5
D1D: Top Overlay "+" at 23.182,111.738 h1.5
D1E: Top Overlay "+" at 23.182,83.738 h1.5
D1F: Top Overlay "+" at 48.182,195.738 h1.5
D1G: Top Overlay "+" at 48.182,167.738 h1.5
D1H: Top Overlay "+" at 48.182,139.738 h1.5
D1I: Top Overlay "+" at 48.182,111.738 h1.5
D1J: Top Overlay "+" at 48.182,83.738 h1.5
D2A: Top Overlay "+" at 23.182,188.738 h1.5
D2B: Top Overlay "+" at 23.182,160.738 h1.5
D2C: Top Overlay "+" at 23.182,132.738 h1.5
D2D: Top Overlay "+" at 23.182,104.738 h1.5
D2E: Top Overlay "+" at 23.182,76.738 h1.5
D2F: Top Overlay "+" at 48.182,188.738 h1.5
D2G: Top Overlay "+" at 48.182,160.738 h1.5
D2H: Top Overlay "+" at 48.182,132.738 h1.5
D2I: Top Overlay "+" at 48.182,104.738 h1.5
D2J: Top Overlay "+" at 48.182,76.738 h1.5
D3A: Top Overlay "+" at 23.182,181.738 h1.5
D3B: Top Overlay "+" at 23.182,153.738 h1.5
D3C: Top Overlay "+" at 23.182,125.738 h1.5
D3D: Top Overlay "+" at 23.182,97.738 h1.5
D3E: Top Overlay "+" at 23.182,69.738 h1.5
D3F: Top Overlay "+" at 48.182,181.738 h1.5
D3G: Top Overlay "+" at 48.182,153.738 h1.5
D3H: Top Overlay "+" at 48.182,125.738 h1.5
D3I: Top Overlay "+" at 48.182,97.738 h1.5
D3J: Top Overlay "+" at 48.182,69.738 h1.5
D4A: Top Overlay "+" at 23.182,174.738 h1.5
D4B: Top Overlay "+" at 23.182,146.738 h1.5
D4C: Top Overlay "+" at 23.182,118.738 h1.5
D4D: Top Overlay "+" at 23.182,90.738 h1.5
D4E: Top Overlay "+" at 23.182,62.738 h1.5
D4F: Top Overlay "+" at 48.182,174.738 h1.5
D4G: Top Overlay "+" at 48.182,146.738 h1.5
D4H: Top Overlay "+" at 48.182,118.738 h1.5
D4I: Top Overlay "+" at 48.182,90.738 h1.5
D4J: Top Overlay "+" at 48.182,62.738 h1.5
D11: Top Overlay "+" at 13.97,16.724 h1.5 r270